# EAGLE board Arduino_MEGA2560_RS485Shield_V1 (EAGLE 9.6.2)
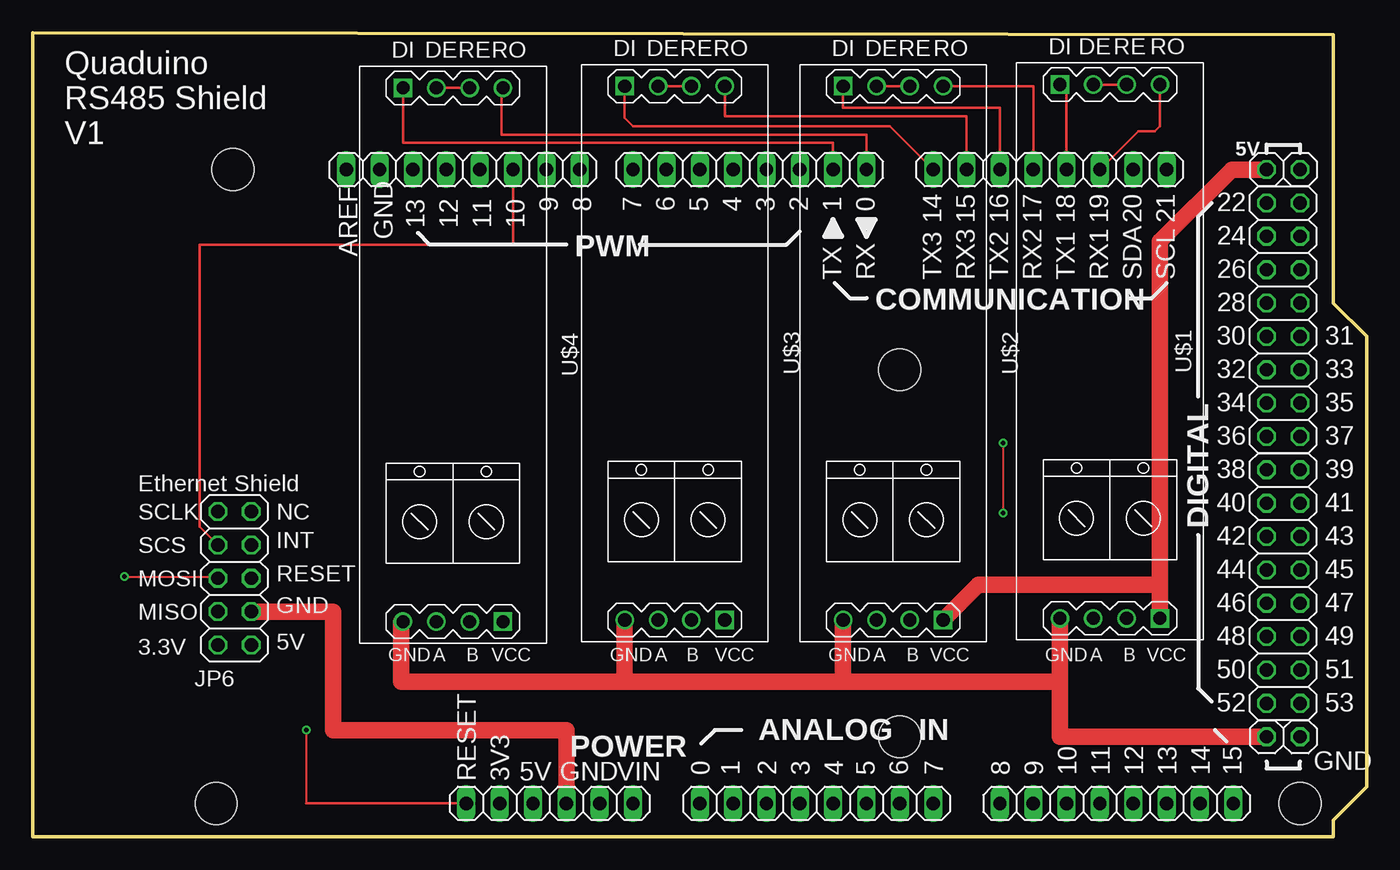
[diagram p0: board, top side]
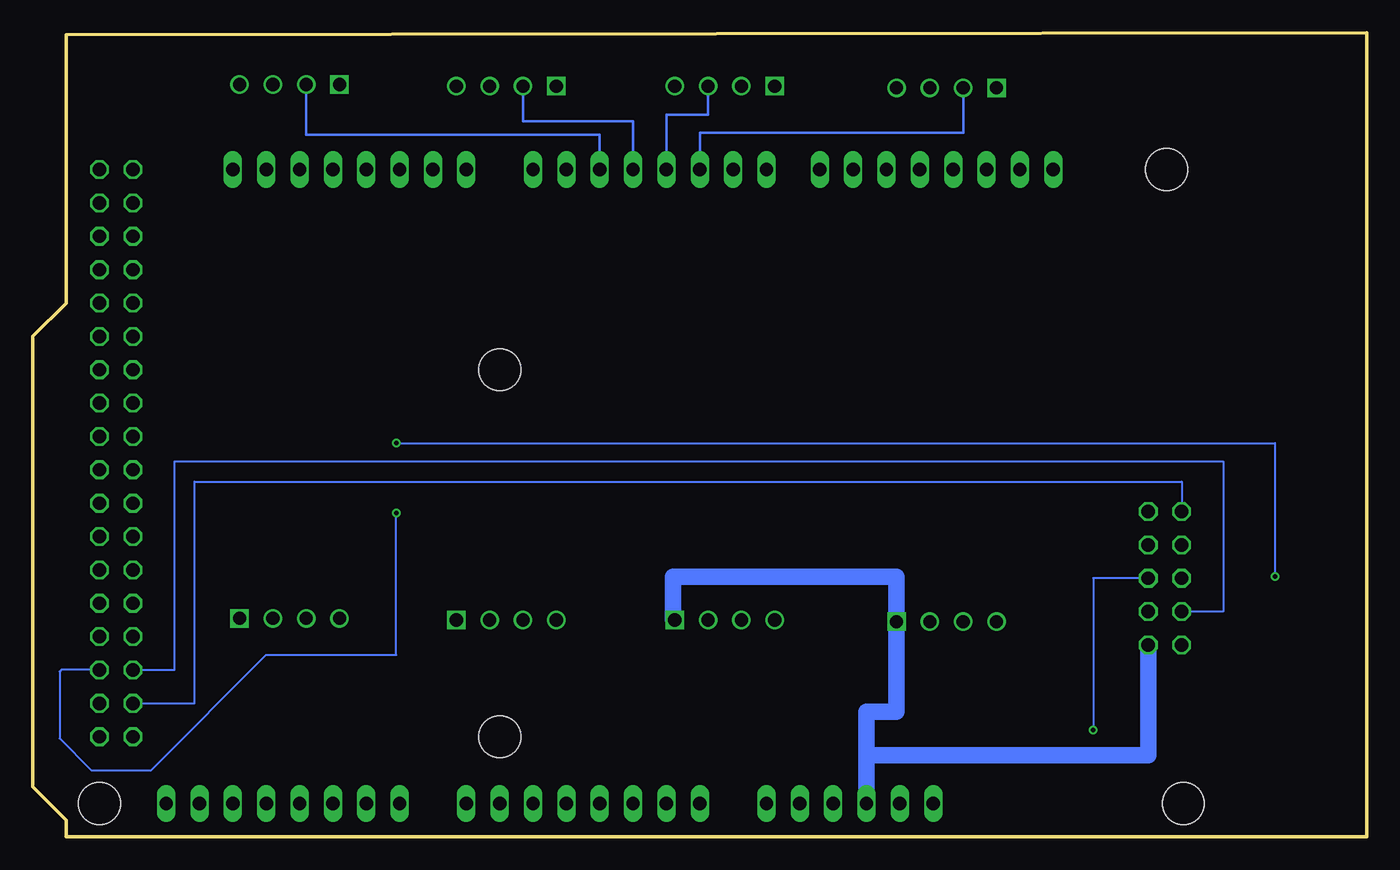
[diagram p1: board, bottom side, seen from below]

Size 101.6 x 61.21 mm. Coordinates in mm from the lower left corner, seen from the top.
Outline: 0,61.21 99.06,61.09 99.06,40.64 101.6,38.1 101.6,3.81 99.06,1.27 99.06,0 0,0 0,61.21
Copper layers (1*16): Top 0.035mm / dielectric 1.5mm / Bottom 0.035mm
Design rules "Aetzwerk-DRC 2 Lagen 35µm Cu": minimum track width 6mil, minimum drill 12mil, track to track 6mil, track to pad 6mil, pad to pad 6mil, via to via 6mil, smd to smd 6mil, copper to edge 20mil, drill to drill 8mil, minimum pad ring 8mil, minimum via ring 6mil, stop-mask expansion 3mil, vias tented up to drill 0mil, thermal gap 8mil
Net classes: 0 default: width 0.15 mm, drill 0.3 mm, clearance 0.15 mm
Holes 3.2 mm at 96.52,2.54 15.24,50.8 13.97,2.54 66.04,35.56 66.04,7.62

## Footprints (pad centres in the part's own frame; a part is rotated, then mirrored left to right if it is on the bottom)
1X08 = drill 1.016 long: 1 -8.89,0; 2 -6.35,0; 3 -3.81,0; 4 -1.27,0; 5 1.27,0; 6 3.81,0; 7 6.35,0; 8 8.89,0
1X01 = drill 1.016 octagon: 1 0,0
2X05 = drill 1.016 octagon: 1 -5.08,-1.27; 2 -5.08,1.27; 3 -2.54,-1.27; 4 -2.54,1.27; 5 0,-1.27; 6 0,1.27; 7 2.54,-1.27; 8 2.54,1.27; 9 5.08,-1.27; 10 5.08,1.27
1X06 = drill 1.016 long: 1 -6.35,0; 2 -3.81,0; 3 -1.27,0; 4 1.27,0; 5 3.81,0; 6 6.35,0
RS485-TTL-CONVERTER = drill 1 square: J1.1 -20.32,-3.81; J2.1 20.32,3.81 | drill 1: J1.2 -20.32,-1.27; J1.3 -20.32,1.27; J1.4 -20.32,3.81; J2.2 20.32,1.27; J2.3 20.32,-1.27; J2.4 20.32,-3.81
2X08 = drill 1.016 octagon: 1 -8.89,-1.27; 2 -8.89,1.27; 3 -6.35,-1.27; 4 -6.35,1.27; 5 -3.81,-1.27; 6 -3.81,1.27; 7 -1.27,-1.27; 8 -1.27,1.27; 9 1.27,-1.27; 10 1.27,1.27; 11 3.81,-1.27; 12 3.81,1.27; 13 6.35,-1.27; 14 6.35,1.27; 15 8.89,-1.27; 16 8.89,1.27

## Placement (x,y rotation side)
ADCH  [1X08]  82.55,2.54 0 top
ADCL  [1X08]  59.69,2.54 0 top
COMMUNICATION  [1X08]  77.47,50.8 180 top
JP1  [1X01]  93.98,50.8 0 top
JP2  [1X01]  96.52,50.8 0 top
JP3  [1X01]  93.98,7.62 0 top
JP4  [1X01]  96.52,7.62 0 top
JP6  PINHD-2X5  [2X05]  15.37,19.68 90 top
POWER  [1X06]  39.37,2.54 0 top
PWMH  [1X08]  32.77,50.8 180 top
PWML  [1X08]  54.61,50.8 180 top
U$1  RS485-TTL-CONVERTER  [RS485-TTL-CONVERTER]  82.04,36.96 270 top
U$2  RS485-TTL-CONVERTER  [RS485-TTL-CONVERTER]  65.53,36.83 270 top
U$3  RS485-TTL-CONVERTER  [RS485-TTL-CONVERTER]  48.9,36.83 270 top
U$4  RS485-TTL-CONVERTER  [RS485-TTL-CONVERTER]  32,36.7 270 top
XIOH  [2X08]  95.25,39.37 90 top
XIOL  [2X08]  95.25,19.05 90 top

## Library data of the parts
ADCH ADCL COMMUNICATION JP1-JP4 POWER PWMH PWML XIOH XIOL = pinhead
JP6 = Connector; CATEGORY: CONNECTOR; SUB-CATEGORY: PIN-HEADER
U$1-U$4 = diy-modules

## Nets
N$1: COMMUNICATION.3 U$1.J1.4
N$2: COMMUNICATION.4 U$1.J1.1
N$3: COMMUNICATION.5 U$2.J1.4
N$4: COMMUNICATION.6 U$2.J1.1
N$5: COMMUNICATION.7 U$3.J1.4
N$6: COMMUNICATION.8 U$3.J1.1
N$7: PWML.1 U$4.J1.4
N$8: PWML.2 U$4.J1.1
N$9: JP6.1 POWER.3 U$3.J2.1 U$4.J2.1
N$10: JP3.1 U$1.J2.4 U$2.J2.4 U$3.J2.4 U$4.J2.4
N$11: JP6.5 POWER.1
N$12: PWML.6 U$4.J1.2 U$4.J1.3
N$13: PWML.5 U$3.J1.2 U$3.J1.3
N$14: PWML.4 U$2.J1.2 U$2.J1.3
N$15: PWML.3 U$1.J1.2 U$1.J1.3
N$16: JP1.1 U$1.J2.1 U$2.J2.1
N$17: JP6.10 XIOL.2
N$18: JP6.4 XIOL.4
N$19: JP6.3 POWER.4
N$21: JP6.6 XIOL.3
N$22: JP6.8 PWMH.3

## Tracks (layer width: path | path; a pad name or v marks a point on that pad's centre or on a via)
N$1
  Top 0.203: COMMUNICATION.3 84.2,53.72 85.47,53.72 85.85,54.1 U$1.J1.4
N$2
  Top 0.203: U$1.J1.1 78.74,56.77 COMMUNICATION.4
N$3
  Top 0.203: U$2.J1.4 76.2,57.15 COMMUNICATION.5
N$4
  Top 0.203: U$2.J1.1 61.72,55.5 73.66,55.5 COMMUNICATION.6
N$5
  Top 0.203: U$3.J1.4 52.7,54.86 71.12,54.86 COMMUNICATION.7
N$6
  Top 0.203: COMMUNICATION.8 65.28,54.1 45.72,54.1 45.09,54.74 U$3.J1.1
N$7
  Top 0.203: PWML.1 63.5,53.47 35.69,53.47 35.69,57.02 U$4.J1.4
N$8
  Top 0.203: PWML.2 60.96,52.83 28.19,52.83 U$4.J1.1
N$9
  Bottom 0.813: 52.83,16.51 U$3.J2.1
  Bottom 1.27: 38.1,6.22 38.1,9.53 35.81,9.53 U$4.J2.1 35.81,19.81 52.83,19.81 52.83,16.51 | 38.1,6.22 POWER.3 | JP6.1 16.64,6.22 38.1,6.22
N$10
  Top 0.813: 28.07,16.38 U$4.J2.4
  Top 1.27: JP3.1 78.23,7.62 U$1.J2.4 78.23,11.81 61.72,11.81 | 61.72,11.81 U$2.J2.4 | 61.72,11.81 45.09,11.81 | U$3.J2.4 45.09,11.81 | 45.09,11.81 28.07,11.81 28.07,16.38
N$11  (via drill 0.35)
  Top 0.152: v20.83,8.13 20.83,2.54
  Top 0.203: POWER.1 20.95,2.54 20.83,2.54
  Bottom 0.152: JP6.5 20.83,19.68 v20.83,8.13
N$12
  Top 0.203: U$4.J1.3 U$4.J1.2
  Bottom 0.203: PWML.6 50.8,53.59 30.73,53.59 U$4.J1.2
N$13
  Top 0.203: U$3.J1.3 U$3.J1.2
  Bottom 0.203: PWML.5 53.34,54.99 50.16,54.99 U$3.J1.3
N$14
  Top 0.203: U$2.J1.3 U$2.J1.2
  Bottom 0.203: PWML.4 55.88,54.48 64.26,54.48 U$2.J1.2
N$15
  Top 0.203: U$1.J1.3 U$1.J1.2
  Bottom 0.203: PWML.3 58.42,53.47 80.77,53.47 U$1.J1.2
N$16
  Top 1.27: JP1.1 91.31,50.8 85.85,45.34 85.85,19.18 | 85.85,19.18 U$1.J2.1 | U$2.J2.1 72.01,19.18 85.85,19.18
N$17
  Bottom 0.152: XIOL.2 89.28,10.16 89.28,27.05 14.1,27.05 JP6.10
N$18
  Bottom 0.152: XIOL.4 90.81,12.7 90.81,28.57 10.92,28.57 10.92,17.14 JP6.4
N$19
  Top 1.27: POWER.4 40.64,8.13 22.86,8.13 22.86,17.14 JP6.3
N$21  (via drill 0.35)
  Top 0.152: v73.91,24.64 v73.91,29.97 | v6.99,19.81 14.1,19.81 JP6.6
  Bottom 0.152: XIOL.3 99.44,12.7 99.57,12.57 99.57,7.49 97.16,5.08 92.58,5.08 83.82,13.84 73.91,13.84 v73.91,24.64 | v73.91,29.97 6.99,29.97 v6.99,19.81
N$22
  Top 0.203: PWMH.3 36.58,45.09 12.7,45.09 12.7,23.62 JP6.8

## Text on the board
tPlace: 9 | 8 | 7 | 6 | 5 | 4 | 3 | 2 | 1 | 0 | 22 | 14 | 15 | 16 | 17 | 18 | 19 | 20 | 21 | 13 | 12 | 11 | 10 | 24 | 26 | 28 | 30 | 31 | 32 | 33 | 34 | 35 | 36 | 37 | 38 | 39 | 40 | 41 | 42 | 43 | 44 | 45 | 46 | 47 | 48 | 49 | 50 | 51 | 52 | 53 | 0 | 1 | 2 | 3 | 4 | 5 | 6 | 7 | 8 | 9 | 10 | 11 | 12 | 13 | 14 | 15
tNames: DI | DE | RE | RO | DI | DE | RE | RO | DI | DE | RE | RO | DI | DE | RE | RO | Quaduino / RS485 Shield / V1 | 5V | GND | AREF | PWM | TX | RX | TX3 | RX3 | TX2 | RX2 | TX1 | RX1 | SDA | SCL | Ethernet Shield | SCLK | NC | DIGITAL | SCS | INT | MOSI | RESET | MISO | GND | 3.3V | 5V | GND | A | B | VCC | GND | A | B | VCC | GND | A | B | VCC | GND | A | B | VCC | ANALOG IN | GND | RESET | 3V3 | 5V | GND | VIN
ReferenceLC: L | TX | RX | PC1 | PC2